# EAGLE board Multiple 20KV Diode (EAGLE 7.2.0)
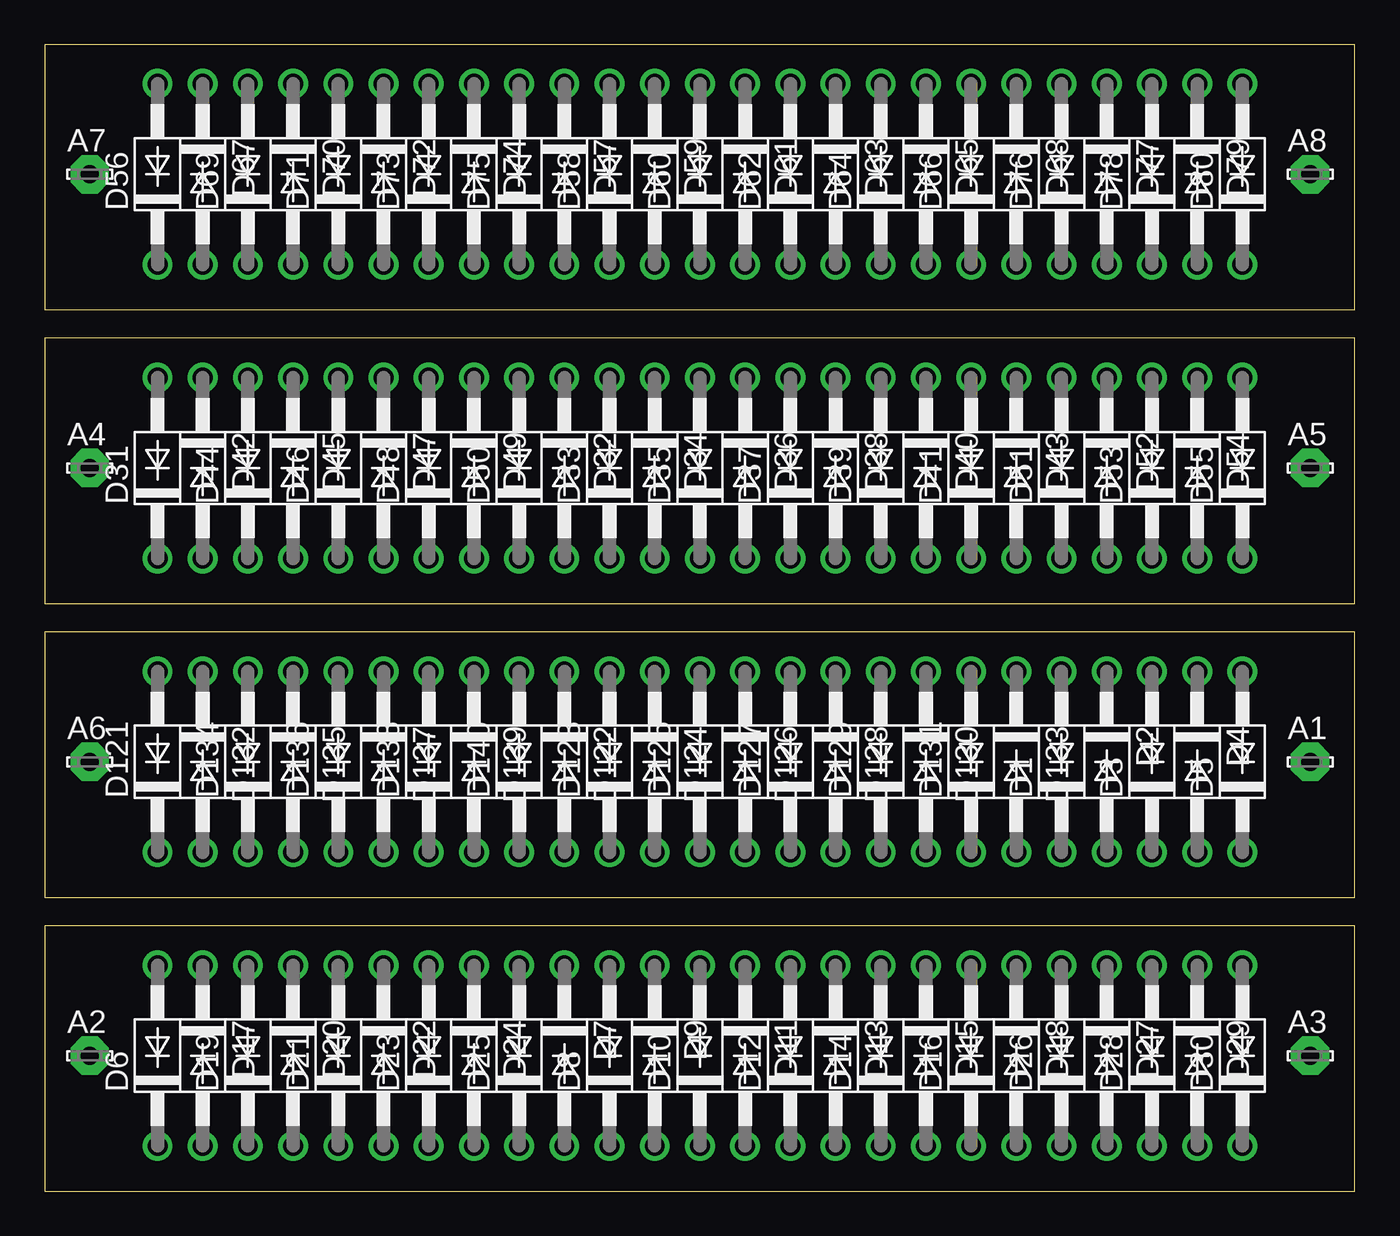
[diagram p0: board, top side]
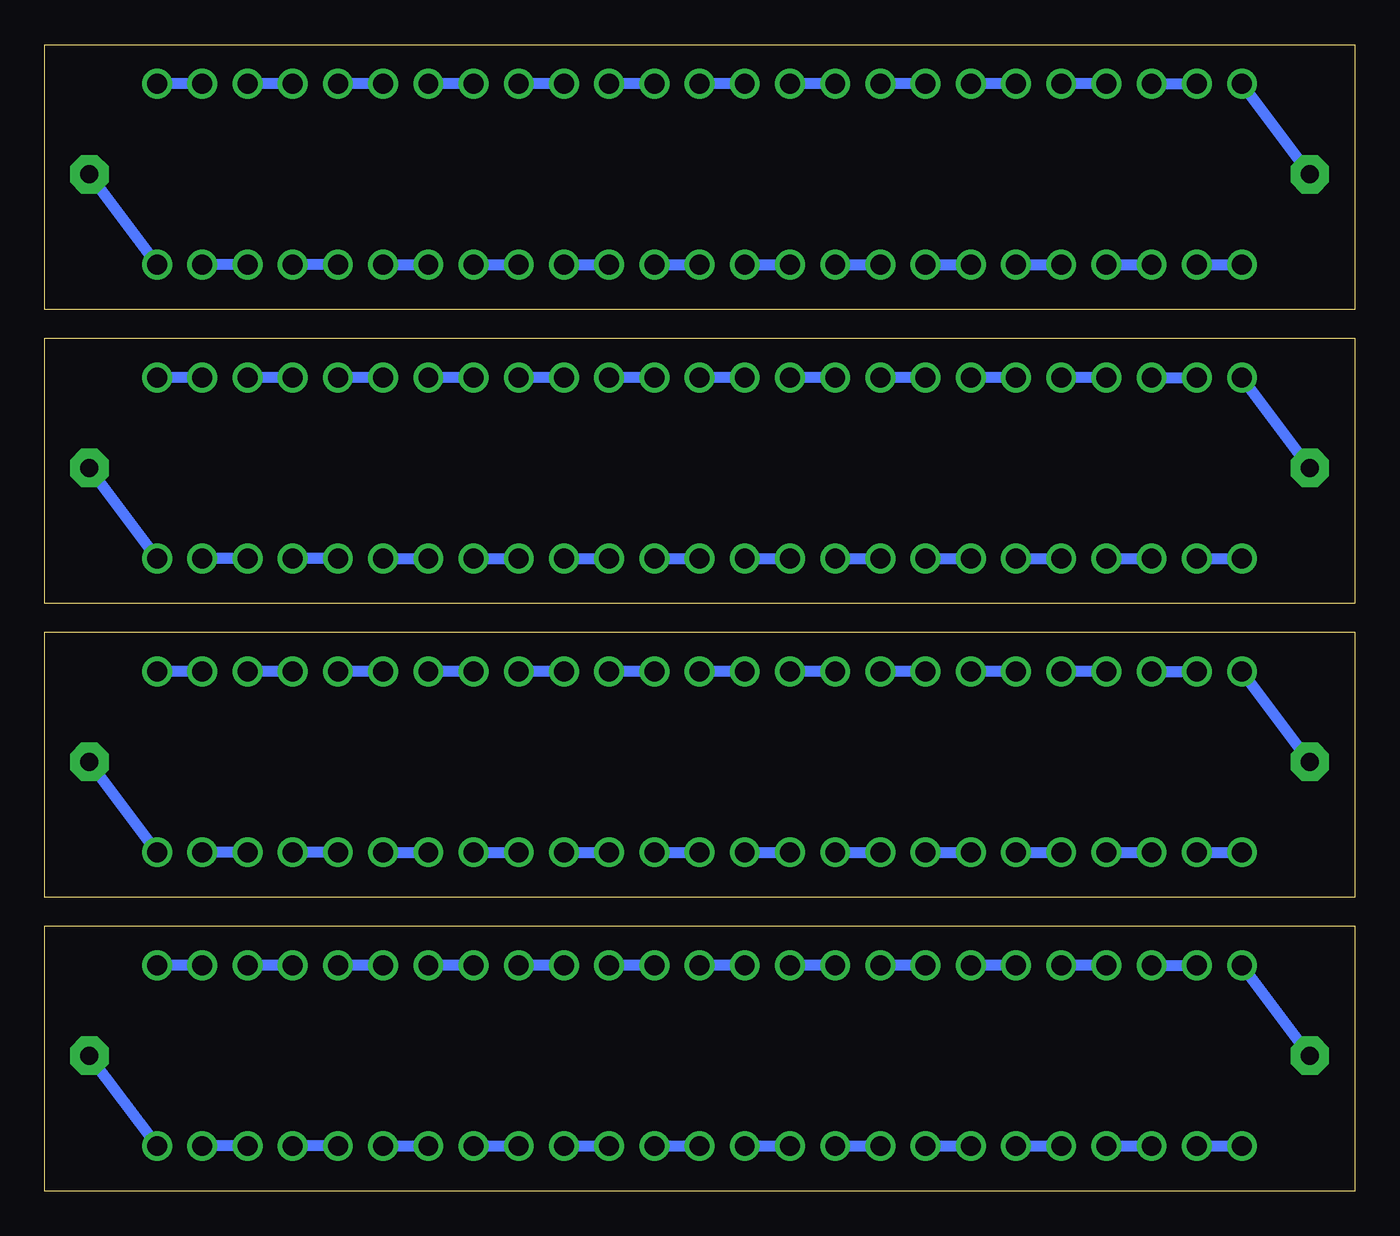
[diagram p1: board, bottom side, seen from below]

Size 73.64 x 64.44 mm. Coordinates in mm from the lower left corner, seen from the top.
Outline: 0,16.51 73.64,16.51 73.64,31.42 0,31.42 0,16.51
Outline: 0,0 73.64,0 73.64,14.91 0,14.91 0,0
Outline: 0,33.02 73.64,33.02 73.64,47.93 0,47.93 0,33.02
Outline: 0,49.53 73.64,49.53 73.64,64.44 0,64.44 0,49.53
Copper layers (1*16): Top 0.035mm / dielectric 1.5mm / Bottom 0.035mm
Design rules "default": minimum track width 10mil, minimum drill 24mil, track to track 8mil, track to pad 8mil, pad to pad 8mil, via to via 8mil, smd to smd 8mil, copper to edge 40mil, drill to drill 8mil, minimum pad ring 10mil, minimum via ring 8mil, stop-mask expansion 4mil, vias tented up to drill 0mil, thermal gap 10mil

## Footprints (pad centres in the part's own frame; a part is rotated, then mirrored left to right if it is on the bottom)
LSP10 = drill 1.016 pad 2.159 octagon: MP 0,0
DO41-10 = drill 1.118: A 5.08,0; C -5.08,0

## Placement (x,y rotation side)
A1  LSP10  [LSP10]  71.12,24.13 0 top
A2  LSP10  [LSP10]  2.54,7.62 0 top
A3  LSP10  [LSP10]  71.12,7.62 0 top
A4  LSP10  [LSP10]  2.54,40.64 0 top
A5  LSP10  [LSP10]  71.12,40.64 0 top
A6  LSP10  [LSP10]  2.54,24.13 0 top
A7  LSP10  [LSP10]  2.54,57.15 0 top
A8  LSP10  [LSP10]  71.12,57.15 0 top
D1  1N4004  [DO41-10]  57.15,24.13 90 top
D2  1N4004  [DO41-10]  59.69,24.13 270 top
D3  1N4004  [DO41-10]  62.23,24.13 90 top
D4  1N4004  [DO41-10]  64.77,24.13 270 top
D5  1N4004  [DO41-10]  67.31,24.13 90 top
D6  1N4004  [DO41-10]  6.35,7.62 90 top
D7  1N4004  [DO41-10]  29.21,7.62 270 top
D8  1N4004  [DO41-10]  31.75,7.62 90 top
D9  1N4004  [DO41-10]  34.29,7.62 270 top
D10  1N4004  [DO41-10]  36.83,7.62 90 top
D11  1N4004  [DO41-10]  39.37,7.62 270 top
D12  1N4004  [DO41-10]  41.91,7.62 90 top
D13  1N4004  [DO41-10]  44.45,7.62 270 top
D14  1N4004  [DO41-10]  46.99,7.62 90 top
D15  1N4004  [DO41-10]  49.53,7.62 270 top
D16  1N4004  [DO41-10]  52.07,7.62 90 top
D17  1N4004  [DO41-10]  8.89,7.62 270 top
D18  1N4004  [DO41-10]  54.61,7.62 270 top
D19  1N4004  [DO41-10]  11.43,7.62 90 top
D20  1N4004  [DO41-10]  13.97,7.62 270 top
D21  1N4004  [DO41-10]  16.51,7.62 90 top
D22  1N4004  [DO41-10]  19.05,7.62 270 top
D23  1N4004  [DO41-10]  21.59,7.62 90 top
D24  1N4004  [DO41-10]  24.13,7.62 270 top
D25  1N4004  [DO41-10]  26.67,7.62 90 top
D26  1N4004  [DO41-10]  57.15,7.62 90 top
D27  1N4004  [DO41-10]  59.69,7.62 270 top
D28  1N4004  [DO41-10]  62.23,7.62 90 top
D29  1N4004  [DO41-10]  64.77,7.62 270 top
D30  1N4004  [DO41-10]  67.31,7.62 90 top
D31  1N4004  [DO41-10]  6.35,40.64 90 top
D32  1N4004  [DO41-10]  29.21,40.64 270 top
D33  1N4004  [DO41-10]  31.75,40.64 90 top
D34  1N4004  [DO41-10]  34.29,40.64 270 top
D35  1N4004  [DO41-10]  36.83,40.64 90 top
D36  1N4004  [DO41-10]  39.37,40.64 270 top
D37  1N4004  [DO41-10]  41.91,40.64 90 top
D38  1N4004  [DO41-10]  44.45,40.64 270 top
D39  1N4004  [DO41-10]  46.99,40.64 90 top
D40  1N4004  [DO41-10]  49.53,40.64 270 top
D41  1N4004  [DO41-10]  52.07,40.64 90 top
D42  1N4004  [DO41-10]  8.89,40.64 270 top
D43  1N4004  [DO41-10]  54.61,40.64 270 top
D44  1N4004  [DO41-10]  11.43,40.64 90 top
D45  1N4004  [DO41-10]  13.97,40.64 270 top
D46  1N4004  [DO41-10]  16.51,40.64 90 top
D47  1N4004  [DO41-10]  19.05,40.64 270 top
D48  1N4004  [DO41-10]  21.59,40.64 90 top
D49  1N4004  [DO41-10]  24.13,40.64 270 top
D50  1N4004  [DO41-10]  26.67,40.64 90 top
D51  1N4004  [DO41-10]  57.15,40.64 90 top
D52  1N4004  [DO41-10]  59.69,40.64 270 top
D53  1N4004  [DO41-10]  62.23,40.64 90 top
D54  1N4004  [DO41-10]  64.77,40.64 270 top
D55  1N4004  [DO41-10]  67.31,40.64 90 top
D56  1N4004  [DO41-10]  6.35,57.15 90 top
D57  1N4004  [DO41-10]  29.21,57.15 270 top
D58  1N4004  [DO41-10]  31.75,57.15 90 top
D59  1N4004  [DO41-10]  34.29,57.15 270 top
D60  1N4004  [DO41-10]  36.83,57.15 90 top
D61  1N4004  [DO41-10]  39.37,57.15 270 top
D62  1N4004  [DO41-10]  41.91,57.15 90 top
D63  1N4004  [DO41-10]  44.45,57.15 270 top
D64  1N4004  [DO41-10]  46.99,57.15 90 top
D65  1N4004  [DO41-10]  49.53,57.15 270 top
D66  1N4004  [DO41-10]  52.07,57.15 90 top
D67  1N4004  [DO41-10]  8.89,57.15 270 top
D68  1N4004  [DO41-10]  54.61,57.15 270 top
D69  1N4004  [DO41-10]  11.43,57.15 90 top
D70  1N4004  [DO41-10]  13.97,57.15 270 top
D71  1N4004  [DO41-10]  16.51,57.15 90 top
D72  1N4004  [DO41-10]  19.05,57.15 270 top
D73  1N4004  [DO41-10]  21.59,57.15 90 top
D74  1N4004  [DO41-10]  24.13,57.15 270 top
D75  1N4004  [DO41-10]  26.67,57.15 90 top
D76  1N4004  [DO41-10]  57.15,57.15 90 top
D77  1N4004  [DO41-10]  59.69,57.15 270 top
D78  1N4004  [DO41-10]  62.23,57.15 90 top
D79  1N4004  [DO41-10]  64.77,57.15 270 top
D80  1N4004  [DO41-10]  67.31,57.15 90 top
D121  1N4004  [DO41-10]  6.35,24.13 90 top
D122  1N4004  [DO41-10]  29.21,24.13 270 top
D123  1N4004  [DO41-10]  31.75,24.13 90 top
D124  1N4004  [DO41-10]  34.29,24.13 270 top
D125  1N4004  [DO41-10]  36.83,24.13 90 top
D126  1N4004  [DO41-10]  39.37,24.13 270 top
D127  1N4004  [DO41-10]  41.91,24.13 90 top
D128  1N4004  [DO41-10]  44.45,24.13 270 top
D129  1N4004  [DO41-10]  46.99,24.13 90 top
D130  1N4004  [DO41-10]  49.53,24.13 270 top
D131  1N4004  [DO41-10]  52.07,24.13 90 top
D132  1N4004  [DO41-10]  8.89,24.13 270 top
D133  1N4004  [DO41-10]  54.61,24.13 270 top
D134  1N4004  [DO41-10]  11.43,24.13 90 top
D135  1N4004  [DO41-10]  13.97,24.13 270 top
D136  1N4004  [DO41-10]  16.51,24.13 90 top
D137  1N4004  [DO41-10]  19.05,24.13 270 top
D138  1N4004  [DO41-10]  21.59,24.13 90 top
D139  1N4004  [DO41-10]  24.13,24.13 270 top
D140  1N4004  [DO41-10]  26.67,24.13 90 top

## Library data of the parts
A1-A8 = solpad
D1-D80 D121-D140 = diode

## Nets
N$1: D7.A D25.C
N$2: D11.C D12.A
N$3: D12.C D13.A
N$4: D13.C D14.A
N$5: D14.C D15.A
N$6: D15.C D16.A
N$7: A2.MP D6.A
N$8: D18.C D26.A
N$9: D6.C D17.A
N$10: D17.C D19.A
N$11: D19.C D20.A
N$12: D20.C D21.A
N$13: D21.C D22.A
N$14: D22.C D23.A
N$15: D23.C D24.A
N$16: D24.C D25.A
N$17: D7.C D8.A
N$18: D8.C D9.A
N$19: D9.C D10.A
N$20: D10.C D11.A
N$21: D16.C D18.A
N$22: D32.A D50.C
N$23: D36.C D37.A
N$24: D37.C D38.A
N$25: D38.C D39.A
N$26: D39.C D40.A
N$27: D40.C D41.A
N$28: A4.MP D31.A
N$29: D43.C D51.A
N$30: D31.C D42.A
N$31: D42.C D44.A
N$32: D44.C D45.A
N$33: D45.C D46.A
N$34: D46.C D47.A
N$35: D47.C D48.A
N$36: D48.C D49.A
N$37: D49.C D50.A
N$38: D32.C D33.A
N$39: D33.C D34.A
N$40: D34.C D35.A
N$41: D35.C D36.A
N$42: D41.C D43.A
N$43: D57.A D75.C
N$44: D61.C D62.A
N$45: D62.C D63.A
N$46: D63.C D64.A
N$47: D64.C D65.A
N$48: D65.C D66.A
N$49: A7.MP D56.A
N$50: D68.C D76.A
N$51: D56.C D67.A
N$52: D67.C D69.A
N$53: D69.C D70.A
N$54: D70.C D71.A
N$55: D71.C D72.A
N$56: D72.C D73.A
N$57: D73.C D74.A
N$58: D74.C D75.A
N$59: D57.C D58.A
N$60: D58.C D59.A
N$61: D59.C D60.A
N$62: D60.C D61.A
N$63: D66.C D68.A
N$127: D122.A D140.C
N$128: D126.C D127.A
N$129: D127.C D128.A
N$130: D128.C D129.A
N$131: D129.C D130.A
N$132: D130.C D131.A
N$133: A6.MP D121.A
N$134: D1.A D133.C
N$135: D121.C D132.A
N$136: D132.C D134.A
N$137: D134.C D135.A
N$138: D135.C D136.A
N$139: D136.C D137.A
N$140: D137.C D138.A
N$141: D138.C D139.A
N$142: D139.C D140.A
N$143: D122.C D123.A
N$144: D123.C D124.A
N$145: D124.C D125.A
N$146: D125.C D126.A
N$147: D131.C D133.A
S$1: D1.C D2.A
S$2: D2.C D3.A
S$3: D3.C D4.A
S$4: D4.C D5.A
S$5: A1.MP D5.C
S$6: D26.C D27.A
S$7: D27.C D28.A
S$8: D28.C D29.A
S$9: D29.C D30.A
S$10: A3.MP D30.C
S$11: D51.C D52.A
S$12: D52.C D53.A
S$13: D53.C D54.A
S$14: D54.C D55.A
S$15: A5.MP D55.C
S$16: D76.C D77.A
S$17: D77.C D78.A
S$18: D78.C D79.A
S$19: D79.C D80.A
S$20: A8.MP D80.C

## Tracks (layer width: path | path; a pad name or v marks a point on that pad's centre or on a via)
N$1
  Bottom 0.61: D7.A D25.C
N$2
  Bottom 0.61: D11.C D12.A
N$3
  Bottom 0.61: D13.A D12.C
N$4
  Bottom 0.61: D13.C D14.A
N$5
  Bottom 0.61: D15.A D14.C
N$6
  Bottom 0.61: D15.C D16.A
N$7
  Bottom 0.61: A2.MP D6.A
N$8
  Bottom 0.61: D18.C D26.A
N$9
  Bottom 0.61: D17.A D6.C
N$10
  Bottom 0.61: D19.A D17.C
N$11
  Bottom 0.61: D20.A D19.C
N$12
  Bottom 0.61: D20.C D21.A
N$13
  Bottom 0.61: D22.A D21.C
N$14
  Bottom 0.61: D22.C D23.A
N$15
  Bottom 0.61: D24.A D23.C
N$16
  Bottom 0.61: D24.C D25.A
N$17
  Bottom 0.61: D7.C D8.A
N$18
  Bottom 0.61: D9.A D8.C
N$19
  Bottom 0.61: D9.C D10.A
N$20
  Bottom 0.61: D11.A D10.C
N$21
  Bottom 0.61: D18.A D16.C
N$22
  Bottom 0.61: D32.A D50.C
N$23
  Bottom 0.61: D36.C D37.A
N$24
  Bottom 0.61: D38.A D37.C
N$25
  Bottom 0.61: D38.C D39.A
N$26
  Bottom 0.61: D40.A D39.C
N$27
  Bottom 0.61: D40.C D41.A
N$28
  Bottom 0.61: A4.MP D31.A
N$29
  Bottom 0.61: D43.C D51.A
N$30
  Bottom 0.61: D42.A D31.C
N$31
  Bottom 0.61: D44.A D42.C
N$32
  Bottom 0.61: D45.A D44.C
N$33
  Bottom 0.61: D45.C D46.A
N$34
  Bottom 0.61: D47.A D46.C
N$35
  Bottom 0.61: D47.C D48.A
N$36
  Bottom 0.61: D49.A D48.C
N$37
  Bottom 0.61: D49.C D50.A
N$38
  Bottom 0.61: D32.C D33.A
N$39
  Bottom 0.61: D34.A D33.C
N$40
  Bottom 0.61: D34.C D35.A
N$41
  Bottom 0.61: D36.A D35.C
N$42
  Bottom 0.61: D43.A D41.C
N$43
  Bottom 0.61: D57.A D75.C
N$44
  Bottom 0.61: D61.C D62.A
N$45
  Bottom 0.61: D63.A D62.C
N$46
  Bottom 0.61: D63.C D64.A
N$47
  Bottom 0.61: D65.A D64.C
N$48
  Bottom 0.61: D65.C D66.A
N$49
  Bottom 0.61: A7.MP D56.A
N$50
  Bottom 0.61: D68.C D76.A
N$51
  Bottom 0.61: D67.A D56.C
N$52
  Bottom 0.61: D69.A D67.C
N$53
  Bottom 0.61: D70.A D69.C
N$54
  Bottom 0.61: D70.C D71.A
N$55
  Bottom 0.61: D72.A D71.C
N$56
  Bottom 0.61: D72.C D73.A
N$57
  Bottom 0.61: D74.A D73.C
N$58
  Bottom 0.61: D74.C D75.A
N$59
  Bottom 0.61: D57.C D58.A
N$60
  Bottom 0.61: D59.A D58.C
N$61
  Bottom 0.61: D59.C D60.A
N$62
  Bottom 0.61: D61.A D60.C
N$63
  Bottom 0.61: D68.A D66.C
N$127
  Bottom 0.61: D122.A D140.C
N$128
  Bottom 0.61: D126.C D127.A
N$129
  Bottom 0.61: D128.A D127.C
N$130
  Bottom 0.61: D128.C D129.A
N$131
  Bottom 0.61: D130.A D129.C
N$132
  Bottom 0.61: D130.C D131.A
N$133
  Bottom 0.61: A6.MP D121.A
N$134
  Bottom 0.61: D133.C D1.A
N$135
  Bottom 0.61: D132.A D121.C
N$136
  Bottom 0.61: D134.A D132.C
N$137
  Bottom 0.61: D135.A D134.C
N$138
  Bottom 0.61: D135.C D136.A
N$139
  Bottom 0.61: D137.A D136.C
N$140
  Bottom 0.61: D137.C D138.A
N$141
  Bottom 0.61: D139.A D138.C
N$142
  Bottom 0.61: D139.C D140.A
N$143
  Bottom 0.61: D122.C D123.A
N$144
  Bottom 0.61: D124.A D123.C
N$145
  Bottom 0.61: D124.C D125.A
N$146
  Bottom 0.61: D126.A D125.C
N$147
  Bottom 0.61: D133.A D131.C
S$1
  Bottom 0.61: D1.C D2.A
S$2
  Bottom 0.61: D2.C D3.A
S$3
  Bottom 0.61: D3.C D4.A
S$4
  Bottom 0.61: D4.C D5.A
S$5
  Bottom 0.61: D5.C A1.MP
S$6
  Bottom 0.61: D26.C D27.A
S$7
  Bottom 0.61: D27.C D28.A
S$8
  Bottom 0.61: D28.C D29.A
S$9
  Bottom 0.61: D29.C D30.A
S$10
  Bottom 0.61: D30.C A3.MP
S$11
  Bottom 0.61: D51.C D52.A
S$12
  Bottom 0.61: D52.C D53.A
S$13
  Bottom 0.61: D53.C D54.A
S$14
  Bottom 0.61: D54.C D55.A
S$15
  Bottom 0.61: D55.C A5.MP
S$16
  Bottom 0.61: D76.C D77.A
S$17
  Bottom 0.61: D77.C D78.A
S$18
  Bottom 0.61: D78.C D79.A
S$19
  Bottom 0.61: D79.C D80.A
S$20
  Bottom 0.61: D80.C A8.MP